# Altium PCB COMM_V3.PcbDoc (part 4 of 5)
Units mm, origin at the board's own origin, x right, y up, seen from the top; angles counter-clockwise.
Board outline 93 x 90 mm, 6 copper layers (Top Layer, L2_GND, L3_PWR, L4_SIG, L5_GND, Bottom Layer), stack 1.634 mm thick; 271 components, 237 nets, 1362 pads, 1090 vias.
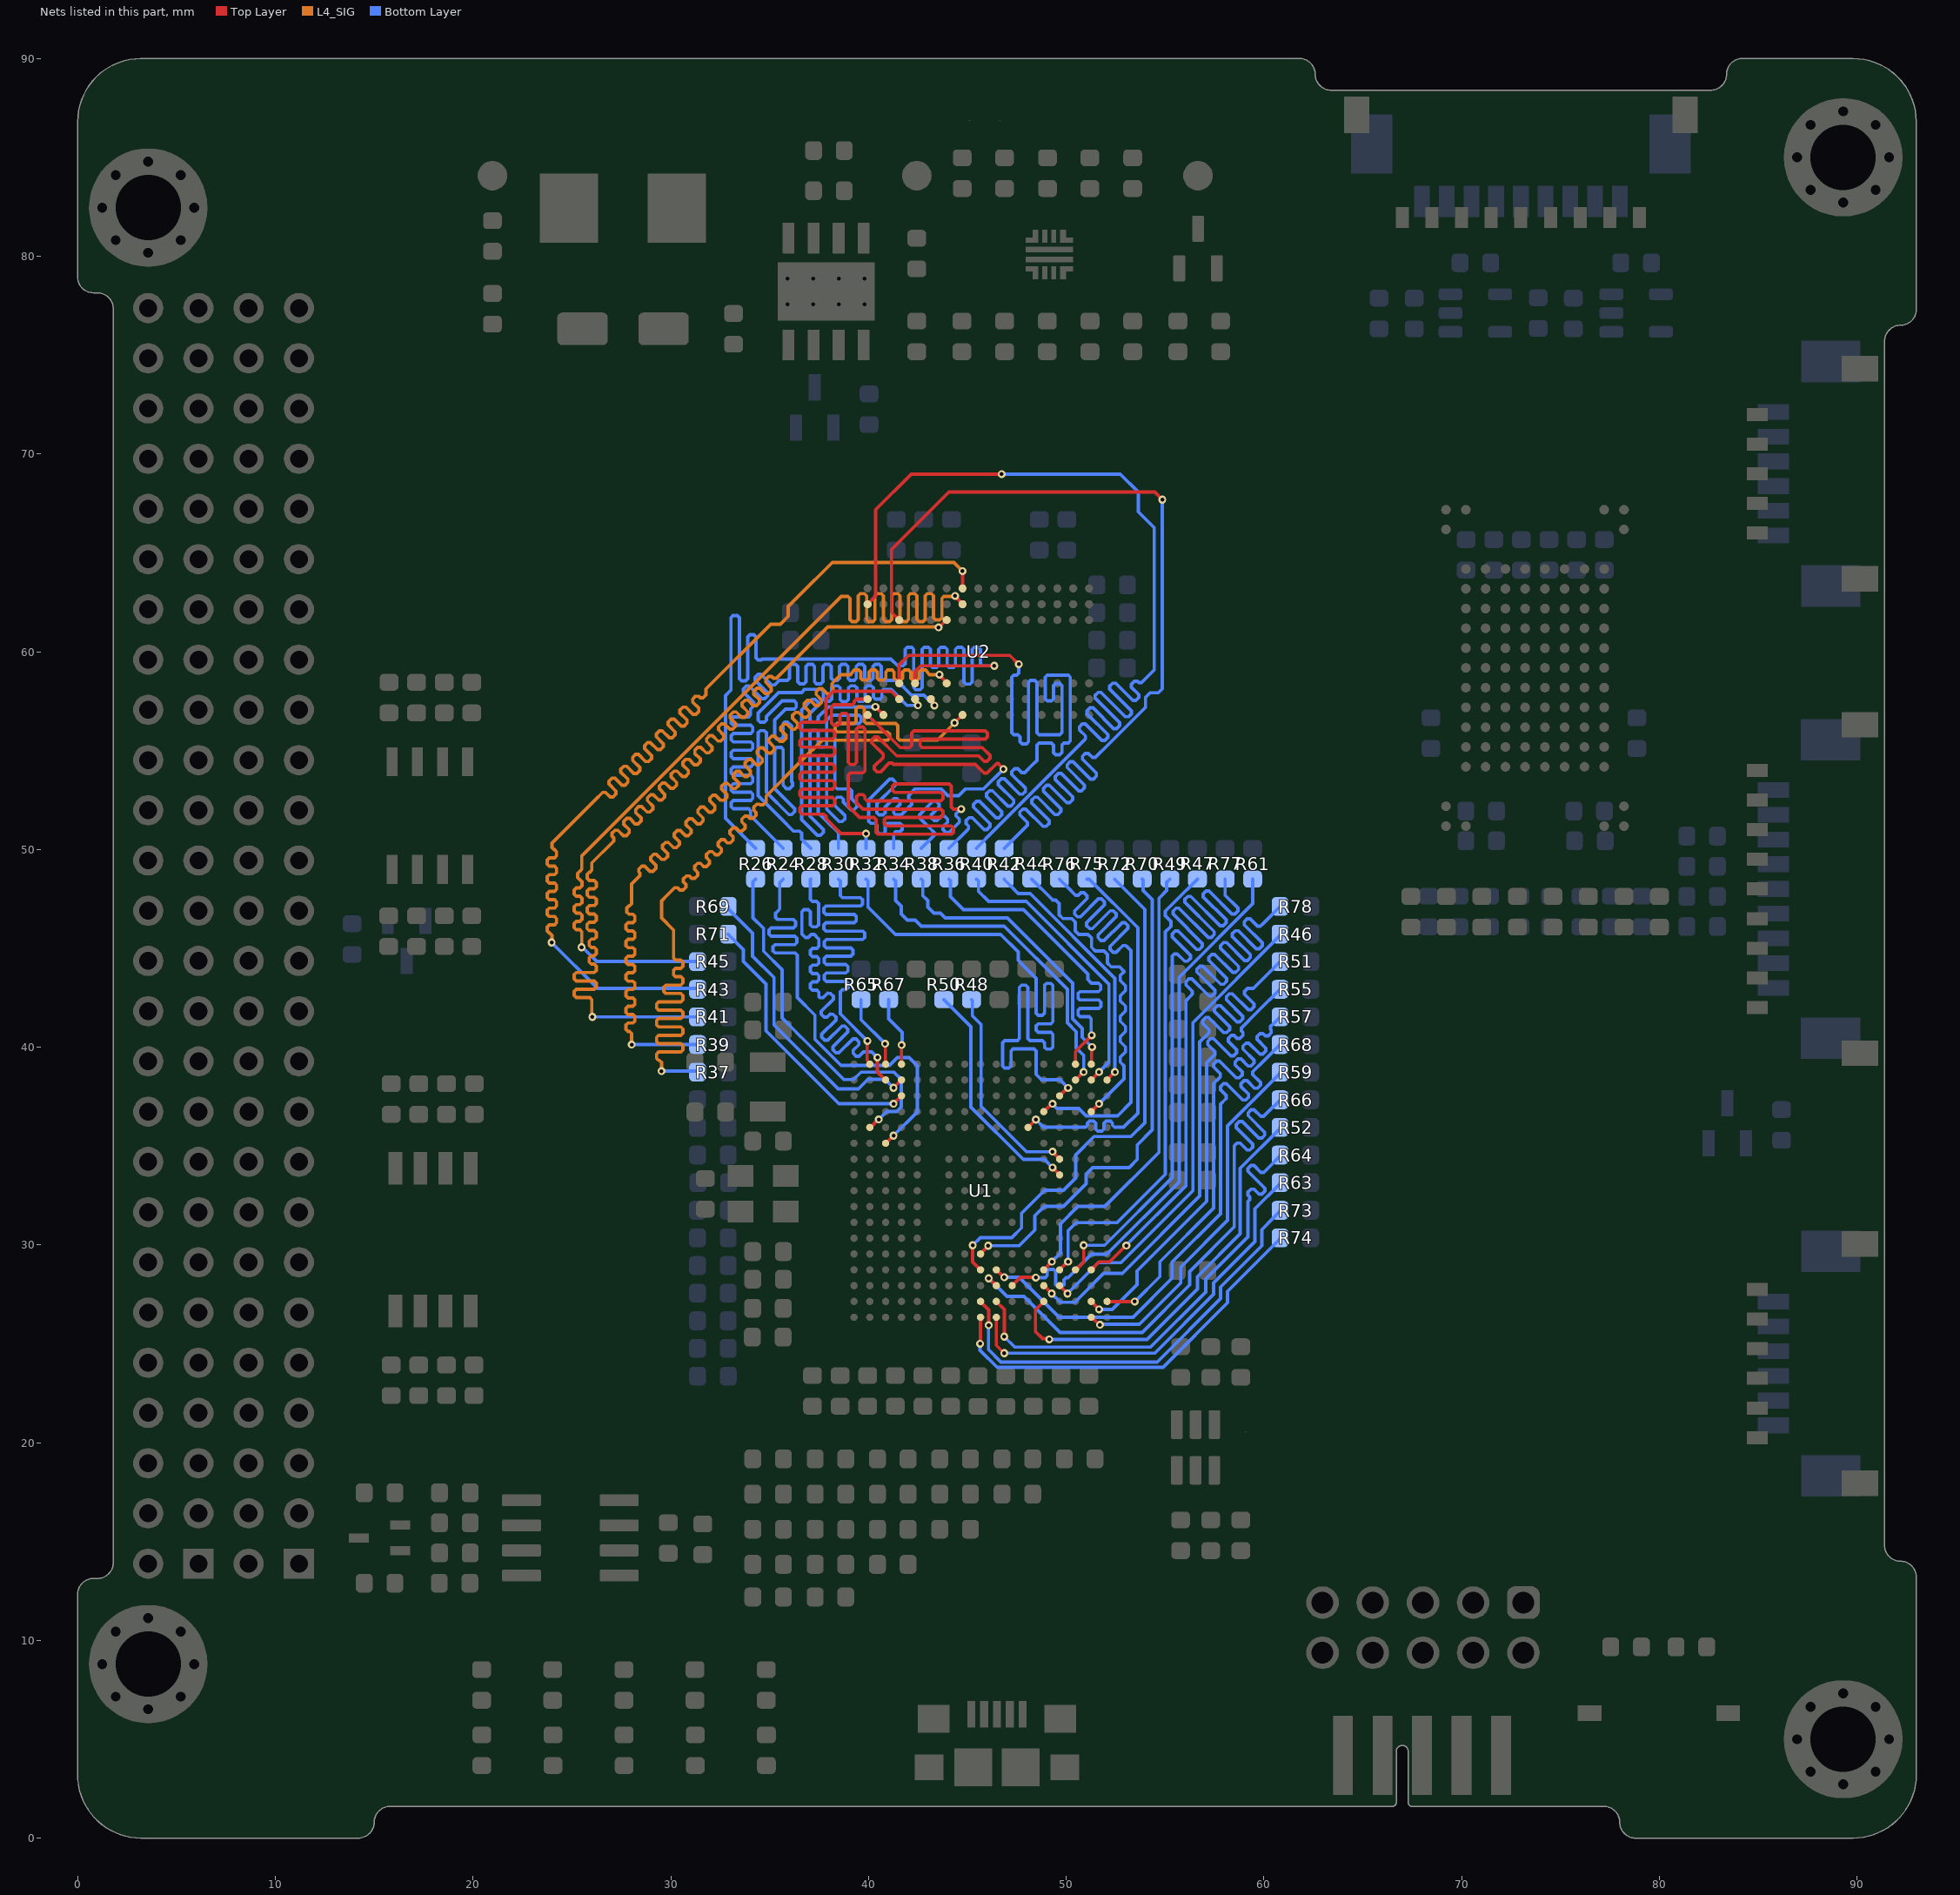
[diagram p8: the nets of this part, all layers, seen from the top]

## Via types
v1: diameter 0.4, hole 0.2, Top Layer to Bottom Layer, tented both sides, 1084 vias
v2: diameter 0.35, hole 0.2, Top Layer to Bottom Layer, tented both sides, 6 vias

## Nets (pads, with @x,y where several pads share a name; then routed paths per layer and width w, separated by ;. In a path a pad name is that pad's centre, name@x,y a point inside that pad or via, vN(x,y) a via of type N, cw(c..) or ccw(c..) an arc to the next point about the centre after c; other vN are vias at no path point) (continued)
SDRAM_B_D22: R42.1 U2.C7 | length 54
  Top Layer w0.169: U2.C7@41.557,61.601 41.166,61.993 41.166,65.169 44.069,68.072 54.483,68.072 v1(54.864,67.691)
  Bottom Layer w0.169: R42.1@46.863,50.051 46.876,50.051 47.979,51.154 48.038,51.213 48.038,51.363 47.658,51.744 47.658,51.893 47.807,52.043 47.957,52.043 48.834,51.165 48.984,51.165 49.133,51.315 49.133,51.464 48.256,52.342 48.256,52.491 48.405,52.641 48.555,52.641 49.432,51.763 49.582,51.763 49.732,51.913 49.732,52.063 48.854,52.94 48.854,53.09 49.004,53.239 49.153,53.239 50.031,52.362 50.18,52.362 50.33,52.511 50.33,52.661 49.452,53.538 49.452,53.688 49.602,53.837 49.751,53.837 50.629,52.96 50.778,52.96 50.928,53.109 50.928,53.259 50.051,54.136 50.051,54.286 50.2,54.436 50.35,54.436 51.227,53.558 51.377,53.558 51.526,53.708 51.526,53.857 50.823,54.56 50.823,54.71 50.973,54.859 51.122,54.859 51.329,54.653 51.478,54.653 52.13,55.305 54.011,57.186 54.011,57.696 54.238,57.923 54.666,57.923 54.864,58.121 54.864,62.918 v1(54.864,67.691)
SDRAM_B_D23: R40.1 U2.A8 | length 53.8
  Top Layer w0.169: U2.A8@39.957,62.401 40.366,62.81 40.366,67.186 42.162,68.982 v1(46.739,68.982)
  Bottom Layer w0.169: R40.1@45.466,50.051 45.466,50.07 45.946,50.551 45.946,50.564 50.916,55.534 50.976,55.594 50.976,55.743 50.671,56.048 50.671,56.198 50.82,56.348 50.97,56.348 51.805,55.512 51.955,55.512 52.104,55.662 52.104,55.811 51.058,56.858 51.058,57.007 51.207,57.157 51.357,57.157 52.403,56.11 52.553,56.11 52.702,56.26 52.702,56.41 51.464,57.647 51.464,57.797 51.614,57.947 51.764,57.947 53.001,56.709 53.151,56.709 53.301,56.858 53.301,57.008 52.202,58.106 52.202,58.256 52.351,58.406 52.501,58.406 53.374,57.533 53.523,57.533 53.673,57.683 53.673,57.832 53.305,58.2 53.305,58.349 53.455,58.499 53.604,58.499 53.668,58.435 53.817,58.435 54.412,59.03 54.455,59.073 54.455,66.268 53.648,67.075 53.648,68.074 52.74,68.982 v1(46.739,68.982)
SDRAM_B_D24: R38.1 U2.A2 | length 52.9
  Top Layer w0.169: U2.A2@39.957,57.601 39.386,57.601 39.287,57.502 39.287,57.418 39.182,57.312 38.872,57.312 38.238,57.312 38.132,57.206 38.132,56.392 38.238,56.286 38.449,56.286 38.555,56.392 38.555,56.783 38.661,56.889 38.872,56.889 38.978,56.783 38.978,54.401 39.084,54.295 39.295,54.295 39.401,54.401 39.401,56.086 39.507,56.192 39.718,56.192 39.824,56.086 39.824,53.978 39.718,53.872 39.084,53.872 38.978,53.766 38.978,52.191 39.555,51.614 40.276,51.614 40.382,51.508 40.382,50.874 40.488,50.768 44.189,50.768 44.295,50.874 44.295,51.085 44.189,51.191 40.911,51.191 40.805,51.297 40.805,51.508 40.911,51.614 43.66,51.614 43.766,51.72 43.766,51.931 43.66,52.037 39.73,52.037 39.401,52.366 39.401,52.669 39.507,52.774 39.718,52.774 39.824,52.669 39.824,52.566 39.93,52.46 43.66,52.46 43.766,52.566 43.766,52.777 43.66,52.883 41.327,52.883 41.221,52.989 41.221,53.2 41.327,53.306 44.083,53.306 44.189,53.2 44.189,52.566 44.189,52.143 44.295,52.037 44.379,52.037 v1(44.69,52.038) v1(44.69,52.038)
  Bottom Layer w0.169: R38.1@42.672,50.051 43.266,50.645 43.326,50.705 43.326,50.855 43.102,51.079 43.027,51.154 42.578,51.602 42.578,51.752 43.268,52.442 43.418,52.442 43.567,52.292 43.567,52.143 43.176,51.752 43.176,51.602 43.326,51.453 43.476,51.453 43.702,51.679 43.852,51.679 44.001,51.53 44.001,51.38 43.775,51.154 43.775,51.004 43.924,50.855 44.074,50.855 44.599,51.38 44.599,51.53 44.419,51.71 44.419,51.798 44.51,51.889 44.659,52.038 v1(44.69,52.038)
SDRAM_B_D25: R36.1 U2.C3 | length 49.2
  Top Layer w0.169: U2.C3@41.557,58.401 41.557,59.337 42.037,59.817 47.152,59.817 v1(47.604,59.365)
  Bottom Layer w0.169: R36.1@44.069,50.051 45.001,50.983 45.061,51.043 45.061,51.192 44.945,51.308 44.945,51.458 45.094,51.607 45.244,51.607 45.85,51.001 46,51.001 46.15,51.15 46.15,51.3 45.314,52.136 45.314,52.285 45.463,52.435 45.613,52.435 46.449,51.599 46.598,51.599 46.748,51.749 46.748,51.898 45.972,52.674 45.972,52.823 46.121,52.973 46.271,52.973 47.047,52.197 47.196,52.197 47.346,52.347 47.346,52.496 46.57,53.272 46.57,53.422 46.72,53.571 46.869,53.571 47.645,52.795 47.795,52.795 47.944,52.945 47.944,53.095 47.25,53.789 47.25,53.938 47.4,54.088 47.549,54.088 47.752,53.884 47.902,53.884 48.049,54.032 48.056,54.039 48.174,54.157 48.249,54.232 48.517,54.499 48.517,55.273 48.623,55.379 49.257,55.379 49.363,55.273 49.363,54.893 49.469,54.787 49.68,54.787 49.786,54.893 49.786,55.273 49.892,55.379 50.103,55.379 50.209,55.485 50.209,58.714 50.103,58.82 49.046,58.82 48.94,58.714 48.94,57.615 49.046,57.509 49.257,57.509 49.363,57.615 49.363,58.291 49.469,58.397 49.68,58.397 49.786,58.291 49.786,55.908 49.68,55.802 48.623,55.802 48.517,55.908 48.517,58.445 48.411,58.551 48.2,58.551 48.094,58.445 48.094,55.449 47.988,55.343 47.777,55.343 47.671,55.449 47.671,55.696 47.565,55.802 47.354,55.802 47.248,55.908 47.248,58.714 47.354,58.82 47.499,58.82 47.604,58.926 47.604,59.01 v1(47.604,59.365)
SDRAM_B_D26: R34.1 U2.A1 | length 49.9
  Top Layer w0.169: U2.A1@39.957,56.801 40.391,56.367 40.526,56.233 40.6,56.158 41.606,55.153 42.088,55.153 42.194,55.258 42.194,55.893 42.3,55.999 45.909,55.999 46.015,55.893 46.015,55.681 45.909,55.576 42.723,55.576 42.617,55.47 42.617,55.258 42.723,55.153 45.756,55.153 46.151,54.757 46.151,54.608 46.002,54.458 45.852,54.458 45.581,54.73 41.43,54.73 40.468,55.692 40.319,55.692 40.169,55.542 40.169,55.393 40.75,54.812 40.75,54.662 40.301,54.214 40.301,54.064 40.451,53.915 40.6,53.915 41.049,54.363 41.199,54.363 41.255,54.307 45.406,54.307 45.852,53.86 46.002,53.86 46.486,54.344 46.564,54.344 46.66,54.249 46.826,54.083 v1(46.826,54.06)
  Bottom Layer w0.169: R34.1@41.275,50.051 41.275,50.709 41.275,50.794 41.381,50.899 41.592,50.899 41.698,51.005 41.698,51.217 41.592,51.322 40.958,51.322 40.852,51.217 40.852,50.899 40.746,50.794 40.535,50.794 40.429,50.899 40.429,51.217 40.323,51.322 40.112,51.322 40.006,51.428 40.006,52.493 41.063,53.55 41.213,53.55 41.362,53.4 41.362,53.251 40.429,52.317 40.429,51.851 40.535,51.745 40.746,51.745 40.852,51.851 40.852,52.142 41.288,52.578 41.437,52.578 41.587,52.428 41.587,52.279 41.275,51.967 41.275,51.851 41.381,51.745 41.652,51.745 41.698,51.792 42.185,52.279 42.185,52.428 42.035,52.578 42.035,52.727 42.095,52.787 42.371,53.063 43.675,53.063 44.02,52.718 44.567,52.718 44.913,53.063 45.829,53.063 v1(46.826,54.06)
SDRAM_B_D27: R32.1 U2.C2 | length 31.9
  Top Layer w0.169: v1(39.878,50.8) 38.608,50.8 37.846,51.562 37.846,51.595 37.846,51.68 37.74,51.785 36.636,51.785 36.53,51.891 36.53,52.103 36.636,52.208 38.179,52.208 38.284,52.314 38.284,52.526 38.179,52.631 36.636,52.631 36.53,52.737 36.53,52.949 36.636,53.054 38.179,53.054 38.284,53.16 38.284,53.372 38.179,53.477 36.636,53.477 36.53,53.583 36.53,53.795 36.636,53.9 38.179,53.9 38.284,54.006 38.284,54.218 38.179,54.323 36.636,54.323 36.53,54.429 36.53,54.641 36.636,54.746 38.179,54.746 38.284,54.852 38.284,55.064 38.179,55.169 36.636,55.169 36.53,55.275 36.53,55.487 36.636,55.592 38.179,55.592 38.284,55.698 38.284,55.91 38.179,56.015 36.636,56.015 36.53,56.121 36.53,56.333 36.636,56.438 37.74,56.438 37.846,56.544 37.846,57.598 37.846,57.601 38.237,57.993 41.166,57.993 U2.C2@41.557,57.601
  Bottom Layer w0.169: R32.1@39.878,50.051 v1(39.878,50.8)
SDRAM_B_D28: R30.1 U2.B1 | length 42.4
  Top Layer w0.169: v1(40.351,57.21) 40.351,57.209 40.748,56.812 U2.B1@40.748,56.793
  Bottom Layer w0.169: R30.1@38.481,50.051 38.481,50.842 38.35,50.973 38.215,51.108 38.141,51.183 37.461,51.863 37.461,54.649 37.566,54.755 37.778,54.755 37.884,54.649 37.884,52.038 38.515,51.407 38.664,51.407 38.814,51.556 38.814,51.706 38.307,52.213 38.307,52.534 38.412,52.64 38.624,52.64 38.73,52.534 38.73,52.388 39.113,52.005 39.262,52.005 39.412,52.155 39.412,52.304 39.153,52.563 39.153,52.957 39.047,53.063 38.412,53.063 38.307,53.169 38.307,56.258 38.412,56.364 39.522,56.364 39.628,56.47 39.628,56.681 39.522,56.787 38.147,56.787 37.884,56.524 37.884,55.284 37.778,55.178 37.566,55.178 37.461,55.284 37.461,55.918 37.355,56.024 37.143,56.024 37.038,55.918 37.038,51.687 37.717,51.008 37.717,50.859 37.567,50.709 37.418,50.709 36.615,51.512 36.615,57.049 37.156,57.591 37.306,57.591 37.455,57.441 37.455,57.292 37.038,56.874 37.038,56.553 37.143,56.447 37.355,56.447 37.461,56.553 37.461,56.699 37.972,57.21 39.522,57.21 39.712,57.21 v1(40.351,57.21)
SDRAM_B_D29: R28.1 U2.D2 | length 43.3
  Top Layer w0.169: U2.D2@42.357,57.601 42.357,57.536 42.459,57.434 42.459,57.331 v1(42.504,57.286)
  Bottom Layer w0.169: R28.1@37.084,50.051 36.615,50.52 36.615,50.828 36.516,50.927 36.208,50.927 36.063,51.072 35.929,51.206 35.854,51.281 34.417,52.718 34.417,55.903 34.523,56.009 34.734,56.009 34.84,55.903 34.84,52.893 35.97,51.763 36.12,51.763 36.269,51.913 36.269,52.062 35.263,53.068 35.263,55.057 35.369,55.163 35.58,55.163 35.686,55.057 35.686,53.244 35.854,53.076 36.004,53.076 36.153,53.225 36.153,53.375 36.109,53.419 36.109,56.196 36.109,56.243 35.908,56.444 35.759,56.444 35.686,56.371 35.686,55.692 35.58,55.586 35.369,55.586 35.263,55.692 35.263,56.546 35.807,57.09 36.241,57.09 36.347,57.196 36.347,57.408 36.241,57.513 35.632,57.513 34.84,56.722 34.84,56.538 34.734,56.432 34.523,56.432 34.417,56.538 34.417,56.897 35.457,57.936 36.424,57.936 36.615,57.936 36.78,58.101 37.107,58.101 37.614,58.101 37.72,57.996 37.72,57.605 37.826,57.499 38.037,57.499 38.143,57.605 38.143,58.171 38.249,58.276 38.46,58.276 38.566,58.171 38.566,57.587 38.672,57.481 38.883,57.481 38.989,57.587 38.989,58.171 39.095,58.276 39.306,58.276 39.412,58.171 39.412,57.587 39.518,57.481 39.729,57.481 39.835,57.587 39.835,58.171 39.941,58.276 40.152,58.276 40.258,58.171 40.258,57.702 40.364,57.596 40.575,57.596 40.681,57.702 40.681,57.996 40.787,58.101 41.126,58.101 41.499,57.727 41.941,57.286 v1(42.504,57.286)
SDRAM_B_D30: R26.1 U2.D3 | length 50
  Top Layer w0.169: U2.D3@42.357,58.401 42.357,59.005 42.637,59.285 v1(46.36,59.285)
  Bottom Layer w0.169: R26.1@34.29,50.051 32.766,51.575 32.766,57.785 32.96,57.979 33.045,58.064 33.045,61.724 33.151,61.83 33.362,61.83 33.468,61.724 33.468,58.633 33.574,58.527 33.785,58.527 33.891,58.633 33.891,60.75 33.997,60.856 34.208,60.856 34.314,60.75 34.314,59.694 34.42,59.588 34.569,59.588 34.611,59.63 35.169,59.63 41.135,59.63 41.48,59.285 41.673,59.285 41.758,59.285 41.863,59.391 41.863,60.122 41.969,60.228 42.181,60.228 42.286,60.122 42.286,58.183 42.392,58.078 42.604,58.078 42.709,58.183 42.709,60.122 42.815,60.228 43.027,60.228 43.132,60.122 43.132,59.308 43.238,59.203 43.45,59.203 43.555,59.308 43.555,60.122 43.661,60.228 43.873,60.228 43.978,60.122 43.978,59.308 44.084,59.203 44.296,59.203 44.401,59.308 44.401,60.122 44.507,60.228 44.719,60.228 44.824,60.122 44.824,58.469 44.93,58.363 45.142,58.363 45.247,58.469 45.247,60.122 45.353,60.228 45.565,60.228 45.67,60.122 45.67,59.391 45.776,59.285 45.967,59.285 v1(46.36,59.285)
SDRAM_B_D31: R24.1 U2.E2 | length 42.6
  Top Layer w0.169: U2.E2@43.157,57.601 43.157,57.536 43.289,57.404 43.289,57.321 v1(43.333,57.276)
  Bottom Layer w0.169: R24.1@35.687,50.051 34.036,51.702 34.036,51.864 34.036,51.949 33.93,52.055 33.159,52.055 33.054,52.16 33.054,52.372 33.159,52.478 34.041,52.478 34.146,52.583 34.146,52.795 34.041,52.901 33.159,52.901 33.054,53.006 33.054,53.218 33.159,53.324 34.041,53.324 34.146,53.429 34.146,53.641 34.041,53.747 33.159,53.747 33.054,53.852 33.054,54.064 33.159,54.17 34.041,54.17 34.146,54.275 34.146,54.487 34.041,54.593 33.159,54.593 33.054,54.698 33.054,54.91 33.159,55.016 34.041,55.016 34.146,55.121 34.146,55.333 34.041,55.439 33.159,55.439 33.054,55.544 33.054,55.756 33.159,55.862 34.041,55.862 34.146,55.967 34.146,56.179 34.041,56.285 33.159,56.285 33.054,56.39 33.054,56.602 33.159,56.708 33.93,56.708 34.036,56.813 34.036,57.1 34.061,57.125 34.146,57.21 34.206,57.27 34.206,57.42 33.668,57.957 33.668,58.107 33.818,58.256 33.967,58.256 34.606,57.618 34.756,57.618 34.905,57.768 34.905,57.917 34.267,58.556 34.267,58.705 34.416,58.855 34.566,58.855 35.103,58.317 35.253,58.317 35.49,58.553 35.57,58.553 35.81,58.553 35.895,58.553 36.001,58.659 36.001,59.254 36.106,59.359 36.318,59.359 36.424,59.254 36.424,58.478 36.529,58.372 36.741,58.372 36.847,58.478 36.847,59.254 36.952,59.359 37.164,59.359 37.27,59.254 37.27,58.478 37.375,58.372 37.587,58.372 37.693,58.478 37.693,59.254 37.798,59.359 38.01,59.359 38.116,59.254 38.116,58.653 38.221,58.547 38.433,58.547 38.539,58.653 38.539,59.254 38.644,59.359 38.856,59.359 38.962,59.254 38.962,58.653 39.067,58.547 39.279,58.547 39.385,58.653 39.385,59.254 39.49,59.359 39.702,59.359 39.808,59.254 39.808,58.653 39.913,58.547 40.125,58.547 40.231,58.653 40.231,59.254 40.336,59.359 40.548,59.359 40.654,59.254 40.654,58.653 40.759,58.547 40.837,58.547 40.922,58.547 41.434,58.547 42.174,57.807 42.802,57.807 v1(43.333,57.276)
SDRAM_BA0: R50.1 U1.H14 | length 11.9
  Top Layer w0.169: v1(49.308,33.914) 49.308,33.907 49.669,33.546 U1.H14@49.669,33.539
  Bottom Layer w0.169: R50.1@43.815,42.405 45.186,41.034 45.186,36.971 47.831,34.326 48.895,34.326 v1@49.307,33.914
SDRAM_BA1: R48.1 U1.G14 | length 10.7
  Top Layer w0.169: v1(49.308,34.713) 49.308,34.706 49.669,34.345 U1.G14@49.669,34.339
  Bottom Layer w0.169: R48.1@45.212,42.405 45.258,42.359 45.258,41.588 45.698,41.148 45.698,37.004 47.989,34.713 v1(49.308,34.713)
SDRAM_D0: R78.2 U1.P16 | length 37.5
  Top Layer w0.169: U1.P16@51.269,28.739 51.673,29.143 52.201,29.143 53.025,29.967 v1(53.044,29.967)
  Bottom Layer w0.169: v1(53.044,29.967) 53.044,29.986 56.063,33.005 56.063,42.36 56.321,42.618 56.381,42.678 56.381,42.828 56.06,43.149 56.06,43.299 56.21,43.448 56.359,43.448 57.223,42.585 57.373,42.585 57.522,42.734 57.522,42.884 56.612,43.794 56.612,43.944 56.762,44.093 56.912,44.093 57.822,43.183 57.971,43.183 58.121,43.333 58.121,43.483 57.211,44.393 57.211,44.542 57.361,44.692 57.51,44.692 58.42,43.782 58.57,43.782 58.72,43.932 58.72,44.081 57.81,44.992 57.81,45.141 57.959,45.291 58.109,45.291 59.019,44.381 59.169,44.381 59.318,44.53 59.318,44.68 58.408,45.59 58.408,45.74 58.558,45.89 58.708,45.89 59.618,44.979 59.767,44.979 59.917,45.129 59.917,45.279 59.007,46.189 59.007,46.339 59.157,46.488 59.306,46.488 59.674,46.121 59.824,46.121 59.979,46.276 R78.2@60.82,47.117
SDRAM_D1: R77.2 U1.P15 | length 40
  Top Layer w0.169: U1.P15@50.486,28.739 50.887,29.14 v1(50.887,29.979)
  Bottom Layer w0.169: v1(50.887,29.979) 51.944,29.979 55.365,33.4 55.365,44.253 55.365,44.611 55.471,44.716 55.621,44.716 55.992,44.345 56.142,44.345 56.292,44.495 56.292,44.644 55.362,45.573 55.362,45.723 55.512,45.873 55.662,45.873 56.591,44.944 56.741,44.944 56.89,45.093 56.89,45.243 55.404,46.73 55.404,46.879 55.553,47.029 55.703,47.029 57.19,45.542 57.339,45.542 57.489,45.692 57.489,45.842 56.002,47.328 56.002,47.478 56.152,47.628 56.302,47.628 57.788,46.141 57.938,46.141 58.088,46.291 58.088,46.44 56.929,47.599 56.929,47.749 57.079,47.899 57.228,47.899 58.387,46.74 58.537,46.74 58.686,46.89 58.686,47.039 58.039,47.686 58.039,48.446 R77.2@58.039,48.501
SDRAM_D2: R76.2 U1.D13 | length 27.9
  Top Layer w0.169: U1.D13@48.869,36.739 v1@49.269,37.139
  Bottom Layer w0.169: v1(49.308,37.139) 49.544,36.903 50.637,36.903 51.007,36.533 52.604,36.533 53.273,37.202 53.273,44.885 53.077,45.081 53.017,45.141 52.867,45.141 52.522,44.796 52.372,44.796 52.223,44.946 52.223,45.095 53.129,46.001 53.129,46.151 52.979,46.301 52.83,46.301 51.914,45.386 51.765,45.386 51.615,45.535 51.615,45.685 52.53,46.6 52.53,46.75 52.38,46.899 52.231,46.899 51.329,45.998 51.18,45.998 51.03,46.148 51.03,46.297 51.931,47.199 51.931,47.349 51.782,47.498 51.632,47.498 50.726,46.592 50.576,46.592 50.427,46.742 50.427,46.891 51.051,47.516 51.051,47.665 50.901,47.815 50.751,47.815 50.622,47.686 50.472,47.686 50.129,48.029 R76.2@49.657,48.501
SDRAM_D3: R75.2 U1.E12 | length 20.3
  Top Layer w0.169: U1.E12@48.069,35.939 v1(48.469,36.339)
  Bottom Layer w0.169: v1(48.469,36.339) 48.861,35.947 50.882,35.947 50.967,35.947 51.073,36.053 51.073,36.156 51.179,36.262 51.39,36.262 51.496,36.156 51.496,35.857 51.602,35.751 51.814,35.751 51.92,35.857 51.92,36.156 52.025,36.262 52.237,36.262 52.343,36.156 52.343,36.053 52.449,35.947 52.733,35.947 52.904,35.947 53.622,36.665 53.622,46.041 51.162,48.501 R75.2@51.054,48.501
SDRAM_D4: R74.2 U1.U9 | length 20.3
  Top Layer w0.169: v1(45.648,25.002) 45.659,25.012 45.659,26.324 U1.U9@45.669,26.334
  Bottom Layer w0.169: v1(45.648,25.002) 45.648,24.674 46.513,23.809 54.897,23.809 58.166,27.078 58.166,27.649 60.81,30.293 60.82,30.293 R74.2@60.82,30.353
SDRAM_D5: R73.2 U1.T9 | length 21.6
  Top Layer w0.169: U1.T9@45.669,27.139 45.669,27.123 46.081,26.711 v1(46.081,25.935)
  Bottom Layer w0.169: v1(46.081,25.935) 46.069,25.923 46.069,24.717 46.705,24.08 54.608,24.08 57.806,27.279 57.806,27.868 59.894,29.955 59.894,30.774 60.473,31.353 60.82,31.7 R73.2@60.82,31.75
SDRAM_D6: R72.2 U1.P9 | length 26.8
  Top Layer w0.169: v1(45.269,29.979) 45.269,29.139 U1.P9@45.669,28.739
  Bottom Layer w0.169: v1(45.269,29.979) 45.662,30.373 47.254,30.373 47.742,30.861 47.742,31.595 48.912,32.764 49.868,32.764 50.478,33.374 50.478,34.544 51.414,35.48 53.279,35.48 53.979,36.18 53.979,46.965 52.451,48.493 R72.2@52.451,48.501
SDRAM_D7: R70.2 U1.N9 | length 25.3
  Top Layer w0.169: U1.N9@45.669,29.539 45.669,29.556 46.055,29.942 v1(46.055,29.959)
  Bottom Layer w0.169: v1(46.055,29.959) 47.625,29.959 48.417,30.751 48.417,31.475 48.891,31.949 49.868,31.949 51.007,33.088 51.007,33.582 51.338,33.913 53.181,33.913 53.594,34.326 53.594,35.052 54.356,35.814 54.356,47.461 53.896,47.921 53.896,48.453 R70.2@53.848,48.501
SDRAM_D8: R68.2 U1.P10 | length 28.4
  Top Layer w0.169: U1.P10@46.469,28.739 46.479,28.739 46.855,28.363 v1(46.865,28.363)
  Bottom Layer w0.169: v1(46.865,28.363) 47.62,28.363 49.64,26.343 53.383,26.343 55.358,28.318 55.358,29.132 57.806,31.58 57.806,37.118 58.037,37.349 58.097,37.409 58.097,37.559 57.803,37.852 57.803,38.002 57.953,38.151 58.103,38.151 58.928,37.326 59.078,37.326 59.228,37.476 59.228,37.625 58.845,38.008 58.845,38.157 58.995,38.307 59.145,38.307 59.527,37.925 59.677,37.925 59.826,38.074 59.826,38.224 59.444,38.606 59.444,38.756 59.979,39.291 R68.2@60.82,40.132
SDRAM_D9: R66.2 U1.R10 | length 29.1
  Top Layer w0.169: v1(46.081,28.307) 46.091,28.307 46.459,27.939 U1.R10@46.469,27.939 U1.R10@46.469,27.933
  Bottom Layer w0.169: v1(46.081,28.307) 47,27.389 47.867,27.389 49.685,25.57 53.842,25.57 56.248,27.976 56.248,28.655 58.504,30.911 58.504,34.721 58.504,35.009 58.539,35.044 58.644,35.149 58.794,35.149 59.145,34.799 59.295,34.799 59.444,34.948 59.444,35.098 58.605,35.937 58.605,36.087 58.755,36.237 58.904,36.237 59.744,35.397 59.893,35.397 60.043,35.547 60.043,35.697 59.204,36.536 59.204,36.686 59.353,36.835 59.503,36.835 59.842,36.497 59.992,36.497 60.237,36.742 60.82,37.325 R66.2@60.82,37.338
SDRAM_D10: R64.2 U1.T10 | length 24.3
  Top Layer w0.169: U1.T10@46.469,27.139 46.88,26.728 46.88,25.375 v1(46.865,25.36)
  Bottom Layer w0.169: v1(46.865,25.36) 47.394,24.831 54.268,24.831 57.059,27.622 57.059,28.268 59.201,30.41 59.201,32.204 59.224,32.226 59.284,32.286 59.284,32.436 59.198,32.521 59.198,32.671 59.348,32.82 59.498,32.82 59.754,32.564 59.904,32.564 60.053,32.714 60.053,32.863 59.198,33.718 59.198,33.868 59.348,34.018 59.498,34.018 59.846,33.669 59.995,33.669 60.266,33.94 60.82,34.494 R64.2@60.82,34.544
SDRAM_D11: R63.2 U1.U10 | length 20.8
  Top Layer w0.169: U1.U10@46.469,26.339 46.469,24.922 46.865,24.526 v1(46.865,24.522)
  Bottom Layer w0.169: v1@46.869,24.522 54.483,24.522 57.458,27.497 57.458,28.072 59.55,30.164 59.55,31.827 60.82,33.097 R63.2@60.82,33.147
SDRAM_D12: R61.2 U1.R11 | length 28.9
  Top Layer w0.169: U1.R11@47.269,27.939 47.693,28.363 48.441,28.363 v1(48.46,28.344)
  Bottom Layer w0.169: v1(48.46,28.344) 48.852,28.344 48.936,28.344 49.042,28.45 49.042,28.658 49.148,28.764 49.36,28.764 49.465,28.658 49.465,27.975 49.571,27.87 49.783,27.87 49.889,27.975 49.889,28.238 49.995,28.344 50.096,28.344 50.907,29.155 51.276,29.524 52.055,29.524 55.714,33.183 55.714,43.534 59.436,47.256 R61.2@59.436,48.501
SDRAM_D13: R59.2 U1.U16 | length 18.3
  Top Layer w0.169: U1.U16@51.269,26.339 51.299,26.339 51.682,25.957 v1(51.712,25.957)
  Bottom Layer w0.169: v1(51.712,25.957) 51.737,25.982 53.703,25.982 55.794,28.072 55.794,28.87 58.166,31.242 58.156,35.814 58.156,36.021 60.82,38.685 R59.2@60.82,38.735
SDRAM_D14: R57.2 U1.T17 | length 24.7
  Top Layer w0.169: U1.T17@52.069,27.139 52.071,27.137 53.465,27.137 v1(53.467,27.136)
  Bottom Layer w0.169: v1(53.467,27.136) 53.476,27.136 54.737,28.396 54.737,29.147 57.458,31.868 57.458,38.167 57.738,38.447 57.798,38.507 57.798,38.656 57.455,38.999 57.455,39.149 57.604,39.298 57.754,39.298 58.604,38.449 58.753,38.449 58.903,38.598 58.903,38.748 58.546,39.105 58.546,39.255 58.696,39.405 58.845,39.405 59.203,39.047 59.352,39.047 59.502,39.197 59.502,39.347 58.943,39.905 58.943,40.055 59.093,40.205 59.243,40.205 59.801,39.646 59.951,39.646 60.101,39.796 60.101,39.945 59.656,40.39 59.656,40.54 59.805,40.69 59.955,40.69 60.072,40.573 60.222,40.573 60.371,40.722 60.371,40.872 60.342,40.901 60.342,41.051 60.486,41.195 R57.2@60.82,41.529
SDRAM_D15: R55.2 U1.T16 | length 24
  Top Layer w0.169: U1.T16@51.269,27.139 v1(51.669,26.739)
  Bottom Layer w0.169: v1(51.669,26.739) 52.331,26.739 53.587,27.996 53.587,28.682 57.109,32.204 57.109,39.215 57.458,39.564 57.518,39.624 57.518,39.773 57.16,40.13 57.16,40.28 57.31,40.43 57.46,40.43 58.324,39.566 58.473,39.566 58.623,39.715 58.623,39.865 58.199,40.289 58.199,40.439 58.349,40.589 58.498,40.589 58.64,40.447 58.79,40.447 58.94,40.596 58.94,40.746 58.865,40.821 58.865,40.971 59.687,41.793 R55.2@60.82,42.926
SDRAM_D16: R52.2 U1.T13 | length 21
  Top Layer w0.169: U1.T13@48.869,27.139 48.869,27.099 48.829,27.099 48.449,26.719 48.449,25.611 48.803,25.258 49.109,25.258 v1(49.144,25.223)
  Bottom Layer w0.169: v1(49.144,25.223) 54.091,25.223 56.642,27.774 56.642,28.396 58.803,30.557 58.803,33.875 60.82,35.892 R52.2@60.82,35.941
SDRAM_D17: R51.2 U1.R13 | length 31.5
  Top Layer w0.169: U1.R13@48.869,27.939 v1(49.269,27.539)
  Bottom Layer w0.169: v1@49.269,27.53 49.278,27.53 49.708,27.1 50.456,27.1 ; 50.437,27.1 51.892,28.555 52.846,28.555 56.76,32.47 56.76,40.263 57.167,40.67 57.227,40.73 57.227,40.88 56.906,41.202 56.906,41.351 57.055,41.501 57.205,41.501 57.967,40.739 58.116,40.739 58.266,40.889 58.266,41.039 57.504,41.8 57.504,41.95 57.654,42.1 57.804,42.1 58.632,41.271 58.782,41.271 58.932,41.421 58.932,41.571 58.103,42.399 58.103,42.549 58.253,42.698 58.402,42.698 59.21,41.891 59.36,41.891 59.509,42.041 59.509,42.19 59.023,42.676 59.023,42.826 59.173,42.975 59.323,42.975 59.472,42.975 60.005,43.508 R51.2@60.82,44.323
SDRAM_D18: R49.2 U1.P13 | length 23.2
  Top Layer w0.169: U1.P13@48.869,28.739 v1(49.278,29.15)
  Bottom Layer w0.169: v1(49.278,29.15) 49.71,29.582 49.71,31.06 50.6,31.949 51.961,31.949 54.698,34.685 54.698,47.532 55.087,47.921 55.087,48.343 R49.2@55.245,48.501
SDRAM_D19: R47.2 U1.P14 | length 24.1
  Top Layer w0.169: U1.P14@49.669,28.739 49.669,28.746 50.063,29.14 v1@50.063,29.147
  Bottom Layer w0.169: v1(50.096,29.147) 50.096,30.72 50.499,31.123 52.574,31.123 55.017,33.566 55.017,45.532 55.017,45.74 55.017,45.825 55.3,46.108 55.3,46.362 55.017,46.645 55.017,46.73 55.017,46.876 55.548,47.407 R47.2@56.642,48.501
SDRAM_D20: R46.2 U1.R14 | length 23.9
  Top Layer w0.169: U1.R14@49.669,27.939 v1(50.069,27.539)
  Bottom Layer w0.169: v1(50.069,27.539) 51.631,29.101 52.772,29.101 56.412,32.741 56.412,41.24 60.82,45.649 R46.2@60.82,45.72
SDRAM_D21: R44.2 U1.D16 | length 16.5
  Top Layer w0.169: U1.D16@51.269,36.739 v1(51.669,37.139)
  Bottom Layer w0.169: R44.2@48.26,48.501 49.263,47.498 49.323,47.438 49.473,47.438 49.652,47.258 49.652,46.684 49.832,46.504 50.281,46.504 50.46,46.325 50.46,45.876 50.64,45.697 51.106,45.697 51.286,45.517 51.286,45.051 51.465,44.871 51.914,44.871 52.094,44.691 52.094,44.243 52.273,44.063 52.698,44.063 52.924,43.837 52.924,43.811 52.74,43.627 52.74,43.373 53.002,43.111 53.002,42.857 52.74,42.594 52.74,42.34 53.002,42.078 53.002,41.824 52.74,41.562 52.74,41.308 53.002,41.046 53.002,40.792 52.74,40.53 52.74,40.276 53.002,40.014 53.002,39.76 52.74,39.497 52.74,39.243 52.924,39.059 52.924,38.394 v1(51.669,37.139)
SDRAM_D22: R42.2 U1.B17 | length 13
  Top Layer w0.169: U1.B17@52.069,38.339 v1(52.469,38.741)
  Bottom Layer w0.169: R42.2@46.863,48.501 46.863,48.482 47.406,47.939 47.406,47.935 47.572,47.769 48.184,47.769 52.469,43.484 v1(52.469,38.741)
SDRAM_D23: R40.2 U1.B16 | length 14.4
  Top Layer w0.169: U1.B16@51.269,38.339 v1(51.669,38.741)
  Bottom Layer w0.169: R40.2@45.466,48.501 45.564,48.403 45.564,47.885 46.075,47.374 47.987,47.374 52.162,43.199 52.162,39.232 51.671,38.741 v1(51.669,38.741)
SDRAM_D24: R38.2 U1.A16 | length 15
  Top Layer w0.169: U1.A16@51.269,39.139 51.289,39.158 51.289,39.986 v1(51.308,40.005)
  Bottom Layer w0.169: R38.2@42.672,48.501 42.75,48.423 42.75,47.661 42.994,47.417 42.994,47.082 43.303,46.773 43.638,46.773 43.874,46.537 47.034,46.537 50.329,43.242 50.329,41.437 50.817,40.95 50.817,40.496 v1(51.308,40.005)
SDRAM_D25: R36.2 U1.A15 | length 18.5
  Top Layer w0.169: U1.A15@50.469,39.139 50.469,39.774 v1(51.295,40.599)
  Bottom Layer w0.169: R36.2@44.069,48.501 44.147,48.423 44.147,47.607 44.798,46.956 47.838,46.956 51.092,43.702 51.092,43.423 51.282,43.232 51.639,43.232 51.745,43.127 51.745,42.915 51.639,42.809 50.706,42.809 50.6,42.703 50.6,42.492 50.706,42.386 51.658,42.386 51.764,42.28 51.764,42.068 51.658,41.962 50.706,41.962 50.6,41.857 50.6,41.645 50.706,41.539 51.16,41.539 51.266,41.433 51.266,41.226 51.266,40.628 v1(51.295,40.599)
SDRAM_D26: R34.2 U1.B15 | length 17
  Top Layer w0.169: U1.B15@50.469,38.339 50.477,38.339 50.879,38.741 v1(50.887,38.741)
  Bottom Layer w0.169: R34.2@41.275,48.501 41.373,48.403 41.373,47.417 41.653,47.137 41.653,46.737 41.961,46.429 42.36,46.429 42.671,46.118 46.861,46.118 50.058,42.921 50.058,41.234 50.511,40.782 50.511,39.965 50.887,39.589 v1(50.887,38.741)
SDRAM_D27: R32.2 U1.C14 | length 36.2
  Top Layer w0.169: U1.C14@49.669,37.539 v1@50.069,37.939
  Bottom Layer w0.169: R32.2@39.878,48.501 39.976,48.403 39.976,47.085 41.363,45.697 ; 41.363,45.7 46.688,45.7 47.572,44.815 47.572,44.396 47.781,44.187 48.482,43.486 48.482,41.71 48.588,41.604 48.8,41.604 48.906,41.71 48.906,43.122 49.012,43.227 49.223,43.227 49.329,43.122 49.329,41.286 49.223,41.181 48.588,41.181 48.482,41.075 48.482,40.863 48.588,40.757 49.223,40.757 49.329,40.651 49.329,40.006 49.223,39.9 49.012,39.9 48.906,40.006 48.906,40.228 48.8,40.334 48.165,40.334 48.059,40.44 48.059,43.029 47.953,43.135 47.742,43.135 47.636,43.029 47.636,40.44 47.53,40.334 46.895,40.334 46.789,40.228 46.789,39.045 46.895,38.939 47.107,38.939 47.212,39.045 47.212,39.805 47.318,39.911 48.377,39.911 48.482,39.805 48.482,38.625 48.757,38.35 49.301,38.35 49.452,38.35 49.684,38.35 v1(50.096,37.939)
SDRAM_D28: R30.2 U1.A2 | length 25.9
  Top Layer w0.169: v1(39.948,40.313) 39.93,40.296 39.93,39.332 40.069,39.193 U1.A2@40.069,39.139
  Bottom Layer w0.169: R30.2@38.481,48.501 38.575,48.407 38.575,47.752 38.575,47.667 38.681,47.561 39.599,47.561 39.705,47.456 39.705,47.244 39.599,47.138 37.855,47.138 37.749,47.032 37.749,46.821 37.855,46.715 39.28,46.715 39.386,46.609 39.386,46.397 39.28,46.291 37.855,46.291 37.749,46.186 37.749,45.974 37.855,45.868 39.71,45.868 39.816,45.762 39.816,45.551 39.71,45.445 37.867,45.445 37.761,45.339 37.761,45.127 37.867,45.021 39.112,45.021 39.218,44.916 39.218,44.704 39.112,44.598 37.867,44.598 37.761,44.492 37.761,44.281 37.867,44.175 38.857,44.175 38.963,44.069 38.963,43.857 38.857,43.751 37.867,43.751 37.761,43.646 37.761,43.434 37.867,43.328 38.865,43.328 38.971,43.222 38.971,43.011 38.865,42.905 38.681,42.905 38.575,42.799 38.575,41.687 38.746,41.515 v1(39.948,40.313)
SDRAM_D29: R28.2 U1.B3 | length 23.9
  Top Layer w0.169: v1(40.455,39.475) 40.455,38.753 U1.B3@40.869,38.339
  Bottom Layer w0.169: R28.2@37.084,48.501 37.055,48.472 37.055,47.561 37.055,47.477 37.16,47.371 37.372,47.371 37.478,47.265 37.478,46.191 37.372,46.085 37.16,46.085 37.055,46.191 37.055,46.842 36.949,46.948 36.737,46.948 36.631,46.842 36.631,45.721 36.808,45.544 36.957,45.544 37.107,45.694 37.257,45.694 37.49,45.46 37.49,45.101 37.385,44.995 37.173,44.995 37.067,44.889 37.067,44.678 37.173,44.572 37.385,44.572 37.49,44.466 37.49,44.254 37.385,44.149 37.173,44.149 37.067,44.043 37.067,43.831 37.173,43.725 37.385,43.725 37.49,43.619 37.49,43.408 37.385,43.302 37.173,43.302 37.067,43.196 37.067,42.984 37.173,42.879 37.385,42.879 37.49,42.773 37.49,42.688 37.49,42.615 37.49,42.561 37.523,42.528 37.553,42.499 37.702,42.498 37.932,42.723 38.081,42.722 38.23,42.571 38.228,42.421 37.612,41.815 37.611,41.666 37.76,41.515 37.909,41.513 38.066,41.667 38.215,41.666 38.364,41.515 38.362,41.365 37.641,40.656 37.639,40.506 37.788,40.355 37.938,40.354 38.662,41.067 38.812,41.065 38.96,40.914 38.959,40.765 38.203,40.021 38.202,39.872 38.35,39.721 38.5,39.719 39.215,40.422 39.364,40.421 39.513,40.27 39.511,40.12 39.232,39.845 39.23,39.696 39.379,39.545 39.529,39.543 39.743,39.755 39.864,39.755 40.17,39.755 40.45,39.475 v1(40.455,39.475)
SDRAM_D30: R26.2 U1.E2 | length 18.7
  Top Layer w0.169: U1.E2@40.069,35.939 40.091,35.939 40.497,36.345 v1(40.52,36.345)
  Bottom Layer w0.169: R26.2@34.29,48.501 34.163,48.374 34.163,46.536 34.695,46.005 34.695,44.854 35.636,43.913 35.636,41.473 36.368,40.741 36.368,40.73 36.579,40.518 36.591,40.518 38.749,38.36 39.245,38.36 39.624,38.739 41.294,38.739 41.664,38.369 41.664,36.976 41.428,36.74 40.921,36.74 40.525,36.345 v1(40.52,36.345)
SDRAM_D31: R24.2 U1.F3 | length 24.9
  Top Layer w0.169: U1.F3@40.869,35.139 40.876,35.139 41.262,35.525 v1(41.269,35.525)
  Bottom Layer w0.169: R24.2@35.687,48.501 35.511,48.325 35.511,47.752 35.511,46.985 35.405,46.879 35.299,46.773 35.299,46.562 35.405,46.456 36.209,46.456 36.315,46.35 36.315,46.138 36.209,46.032 35.071,46.032 34.966,45.927 34.966,45.715 35.071,45.609 36.278,45.609 36.384,45.503 36.384,45.292 36.278,45.186 35.276,45.186 35.17,45.08 35.17,44.868 35.276,44.762 36.294,44.762 36.4,44.657 36.4,44.572 36.4,42.515 37.294,41.62 37.294,40.392 38.613,39.074 41.06,39.074 41.462,39.475 42.057,39.475 42.469,39.063 42.469,36.726 v1(41.269,35.525)
SDRAM_NBL0: R71.1 U1.C4 | length 14.2
  Top Layer w0.169: v1(41.269,37.139) U1.C4@41.669,37.539
  Bottom Layer w0.169: R71.1@32.898,45.712 33.674,44.936 33.674,44.338 34.814,43.198 34.814,40.828 38.503,37.139 v1(41.269,37.139)
SDRAM_NBL1: R69.1 U1.B4 | length 15.3
  Top Layer w0.169: v1(41.269,37.946) 41.273,37.946 41.666,38.339 U1.B4@41.669,38.339
  Bottom Layer w0.169: R69.1@32.906,47.117 32.906,46.998 34.137,45.767 34.137,44.602 35.225,43.514 35.225,41.12 38.462,37.883 39.493,37.883 39.978,38.369 40.846,38.369 v1(41.269,37.946)
SDRAM_NBL2: R67.1 U1.A4 | length 3.6
  Top Layer w0.169: U1.A4@41.669,39.139 41.672,39.142 41.672,40.103 v1(41.675,40.106)
  Bottom Layer w0.169: R67.1@41.021,42.405 41.021,42.213 41.021,41.429 41.702,40.749 41.702,40.133 v1(41.675,40.106)
SDRAM_NBL3: R65.1 U1.A3 | length 3.8
  Top Layer w0.169: v1(40.841,40.175) 40.855,40.161 40.855,39.153 U1.A3@40.869,39.139
  Bottom Layer w0.169: R65.1@39.624,42.405 39.624,41.821 39.624,41.393 v1(40.841,40.175)
SDRAM_R_A0: R45.2 U2.G8 | length 52.5
  Top Layer w0.169: v1(44.38,62.821) 44.38,62.8 44.757,62.423 U2.G8@44.757,62.401
  L4_SIG w0.169: v1(25.489,45.053) 25.501,45.065 25.501,45.747 25.501,45.831 25.396,45.937 25.226,45.937 25.12,46.043 25.12,46.254 25.226,46.36 25.402,46.36 25.508,46.466 25.508,46.677 25.402,46.783 25.226,46.783 25.12,46.889 25.12,47.1 25.226,47.206 25.402,47.206 25.508,47.312 25.508,47.523 25.402,47.629 25.226,47.629 25.12,47.735 25.12,47.946 25.226,48.052 25.402,48.052 25.508,48.158 25.508,48.369 25.402,48.475 25.39,48.475 25.285,48.581 25.285,48.792 25.39,48.898 25.396,48.898 25.501,49.004 25.501,49.675 25.555,49.729 38.448,62.622 38.628,62.802 38.956,62.802 39.062,62.696 39.062,61.626 39.167,61.52 39.379,61.52 39.485,61.626 39.485,62.831 39.59,62.937 39.802,62.937 39.908,62.831 39.908,61.626 40.013,61.52 40.225,61.52 40.331,61.626 40.331,62.831 40.436,62.937 40.648,62.937 40.754,62.831 40.754,61.626 40.859,61.52 41.071,61.52 41.177,61.626 41.177,62.831 41.282,62.937 41.494,62.937 41.6,62.831 41.6,61.626 41.705,61.52 41.917,61.52 42.023,61.626 42.023,62.831 42.128,62.937 42.34,62.937 42.446,62.831 42.446,61.626 42.551,61.52 42.763,61.52 42.869,61.626 42.869,62.831 42.974,62.937 43.186,62.937 43.292,62.831 43.292,61.717 43.397,61.611 43.609,61.611 43.714,61.717 43.714,62.696 43.82,62.802 44.111,62.802 44.361,62.802 v1(44.38,62.821)
  Bottom Layer w0.169: v1(25.489,45.053) 25.534,45.053 26.257,44.329 31.35,44.329 R45.2@31.356,44.323
SDRAM_R_A1: R43.2 U2.G9 | length 54.2
  Top Layer w0.169: U2.G9@44.757,63.201 v1(44.757,64.074)
  L4_SIG w0.169: v1(23.975,45.295) 23.99,45.31 23.99,45.573 23.99,45.658 23.884,45.764 23.863,45.764 23.757,45.869 23.757,46.081 23.863,46.187 24.118,46.187 24.223,46.292 24.223,46.504 24.118,46.61 23.863,46.61 23.757,46.715 23.757,46.927 23.863,47.033 24.118,47.033 24.223,47.138 24.223,47.35 24.118,47.456 23.863,47.456 23.757,47.561 23.757,47.773 23.863,47.879 24.118,47.879 24.223,47.984 24.223,48.196 24.118,48.302 23.863,48.302 23.757,48.407 23.757,48.619 23.863,48.725 24.118,48.725 24.223,48.83 24.223,49.042 24.118,49.148 23.863,49.148 23.757,49.253 23.757,49.465 23.863,49.571 24.118,49.571 24.223,49.676 24.223,49.888 24.118,49.994 24.096,49.994 23.99,50.099 23.99,50.211 23.99,50.322 26.194,52.525 26.553,52.884 26.702,52.884 26.935,52.652 27.084,52.652 27.234,52.801 27.234,52.951 26.878,53.307 26.878,53.457 27.027,53.606 27.177,53.606 27.533,53.25 27.683,53.25 27.832,53.399 27.832,53.549 27.476,53.905 27.476,54.055 27.625,54.204 27.775,54.204 28.131,53.848 28.281,53.848 28.43,53.998 28.43,54.147 28.074,54.504 28.074,54.653 28.224,54.803 28.373,54.803 28.73,54.446 28.879,54.446 29.029,54.596 29.029,54.745 28.672,55.102 28.672,55.251 28.822,55.401 28.971,55.401 29.328,55.044 29.477,55.044 29.627,55.194 29.627,55.344 29.271,55.7 29.271,55.849 29.42,55.999 29.57,55.999 29.926,55.643 30.076,55.643 30.225,55.792 30.225,55.942 29.869,56.298 29.869,56.448 30.018,56.597 30.168,56.597 30.524,56.241 30.674,56.241 30.823,56.39 30.823,56.54 30.467,56.896 30.467,57.046 30.616,57.195 30.766,57.195 31.122,56.839 31.272,56.839 31.422,56.989 31.422,57.138 31.11,57.45 31.11,57.6 31.259,57.749 31.409,57.749 31.488,57.67 31.637,57.67 31.787,57.82 31.787,57.969 31.787,58.119 35.06,61.392 35.536,61.392 35.941,61.797 35.941,62.282 36.475,62.816 38.175,64.516 44.315,64.516 v1(44.757,64.074)
  Bottom Layer w0.169: v1(23.975,45.295) 26.304,42.965 31.317,42.965 R43.2@31.356,42.926
SDRAM_R_A2: R41.2 U2.F7 | length 56.2
  Top Layer w0.169: v1(43.546,61.225) 43.563,61.225 43.94,61.601 U2.F7@43.957,61.601
  L4_SIG w0.169: v1(26.035,41.529) 26.005,41.559 26.005,42.316 26.005,42.401 25.899,42.507 25.226,42.507 25.12,42.612 25.12,42.824 25.226,42.93 26.133,42.93 26.238,43.035 26.238,43.247 26.133,43.353 25.226,43.353 25.12,43.458 25.12,43.67 25.226,43.776 26.133,43.776 26.238,43.881 26.238,44.093 26.133,44.199 25.981,44.199 25.875,44.304 25.875,44.516 25.981,44.622 26.133,44.622 26.238,44.727 26.238,44.939 26.133,45.045 25.981,45.045 25.875,45.15 25.875,45.362 25.981,45.468 26.133,45.468 26.238,45.573 26.238,45.785 26.133,45.891 25.871,45.891 25.765,45.996 25.765,46.208 25.871,46.314 26.133,46.314 26.238,46.419 26.238,46.631 26.133,46.737 25.878,46.737 25.772,46.842 25.772,47.054 25.878,47.16 26.133,47.16 26.238,47.265 26.238,47.477 26.133,47.583 25.878,47.583 25.772,47.688 25.772,47.9 25.878,48.006 26.133,48.006 26.238,48.111 26.238,48.323 26.133,48.429 25.878,48.429 25.772,48.534 25.772,48.746 25.878,48.852 25.899,48.852 26.005,48.957 26.005,49.158 26.005,49.319 27.059,50.372 27.118,50.432 27.118,50.582 27.029,50.671 27.029,50.82 27.179,50.97 27.328,50.97 27.602,50.697 27.751,50.697 27.901,50.846 27.901,50.996 27.627,51.269 27.627,51.419 27.777,51.568 27.927,51.568 28.2,51.295 28.349,51.295 28.499,51.444 28.499,51.594 28.226,51.867 28.226,52.017 28.375,52.166 28.525,52.166 28.798,51.893 28.948,51.893 29.097,52.043 29.097,52.192 28.824,52.465 28.824,52.615 28.973,52.765 29.123,52.765 29.396,52.491 29.546,52.491 29.695,52.641 29.695,52.79 29.422,53.064 29.422,53.213 29.572,53.363 29.721,53.363 29.994,53.09 30.144,53.09 30.294,53.239 30.294,53.389 30.02,53.662 30.02,53.811 30.17,53.961 30.319,53.961 30.593,53.688 30.742,53.688 30.892,53.837 30.892,53.987 30.619,54.26 30.619,54.41 30.768,54.559 30.918,54.559 31.191,54.286 31.34,54.286 31.49,54.436 31.49,54.585 31.217,54.858 31.217,55.008 31.366,55.157 31.516,55.157 31.789,54.884 31.939,54.884 32.088,55.034 32.088,55.183 31.815,55.456 31.815,55.606 31.965,55.756 32.114,55.756 32.387,55.482 32.537,55.482 32.686,55.632 32.686,55.781 32.413,56.055 32.413,56.204 32.563,56.354 32.712,56.354 32.985,56.081 33.135,56.081 33.285,56.23 33.285,56.38 33.011,56.653 33.011,56.802 33.161,56.952 33.31,56.952 33.584,56.679 33.733,56.679 33.883,56.828 33.883,56.978 33.61,57.251 33.61,57.401 33.759,57.55 33.909,57.55 34.182,57.277 34.331,57.277 34.481,57.427 34.481,57.576 34.208,57.849 34.208,57.999 34.357,58.148 34.507,58.148 34.78,57.875 34.93,57.875 35.079,58.025 35.079,58.174 34.806,58.448 34.806,58.597 34.956,58.747 35.105,58.747 35.194,58.657 35.344,58.657 35.959,59.273 37.936,61.25 43.521,61.25 v1(43.546,61.225)
  Bottom Layer w0.169: v1(26.035,41.529) R41.2@31.356,41.529
SDRAM_R_A3: R39.2 U2.F3 | length 54.9
  Top Layer w0.169: v1(43.59,58.843) 43.59,58.806 43.957,58.439 U2.F3@43.957,58.401
  L4_SIG w0.169: v1(28.02,40.132) 28.02,40.609 28.02,40.694 27.914,40.799 27.838,40.799 27.732,40.905 27.732,41.117 27.838,41.222 28.082,41.222 28.187,41.328 28.187,41.54 28.082,41.645 27.838,41.645 27.732,41.751 27.732,41.963 27.838,42.068 28.082,42.068 28.187,42.174 28.187,42.386 28.082,42.491 27.838,42.491 27.732,42.597 27.732,42.809 27.838,42.914 28.082,42.914 28.187,43.02 28.187,43.232 28.082,43.337 27.838,43.337 27.732,43.443 27.732,43.655 27.838,43.76 28.082,43.76 28.187,43.866 28.187,44.078 28.082,44.183 27.838,44.183 27.732,44.289 27.732,44.501 27.838,44.606 28.082,44.606 28.187,44.712 28.187,44.924 28.082,45.029 27.838,45.029 27.732,45.135 27.732,45.347 27.838,45.452 28.082,45.452 28.187,45.558 28.187,45.77 28.082,45.875 27.838,45.875 27.732,45.981 27.732,46.193 27.838,46.298 28.082,46.298 28.187,46.404 28.187,46.616 28.082,46.721 27.88,46.721 27.774,46.827 27.774,47.039 27.88,47.144 27.914,47.144 28.02,47.25 28.02,48.25 28.223,48.453 28.372,48.601 28.431,48.661 28.431,48.81 28.383,48.859 28.383,49.008 28.533,49.158 28.682,49.158 28.945,48.895 29.095,48.895 29.244,49.044 29.244,49.194 28.981,49.457 28.981,49.606 29.131,49.756 29.281,49.756 29.543,49.493 29.693,49.493 29.842,49.643 29.842,49.792 29.58,50.055 29.58,50.205 29.729,50.354 29.879,50.354 30.142,50.091 30.291,50.091 30.441,50.241 30.441,50.39 30.178,50.653 30.178,50.803 30.327,50.952 30.477,50.952 30.74,50.689 30.889,50.689 31.039,50.839 31.039,50.989 30.776,51.251 30.776,51.401 30.926,51.55 31.075,51.55 31.338,51.288 31.488,51.288 31.637,51.437 31.637,51.587 31.374,51.85 31.374,51.999 31.524,52.149 31.673,52.149 31.936,51.886 32.086,51.886 32.235,52.035 32.235,52.185 31.973,52.448 31.973,52.597 32.122,52.747 32.272,52.747 32.534,52.484 32.684,52.484 32.834,52.634 32.834,52.783 32.571,53.046 32.571,53.196 32.72,53.345 32.87,53.345 33.133,53.082 33.282,53.082 33.432,53.232 33.432,53.381 33.169,53.644 33.169,53.794 33.318,53.943 33.468,53.943 33.731,53.681 33.88,53.681 34.03,53.83 34.03,53.98 33.767,54.242 33.767,54.392 33.917,54.542 34.066,54.542 34.329,54.279 34.479,54.279 34.628,54.428 34.628,54.578 34.365,54.841 34.365,54.99 34.515,55.14 34.664,55.14 34.927,54.877 35.077,54.877 35.226,55.026 35.226,55.176 34.964,55.439 34.964,55.588 35.113,55.738 35.263,55.738 35.526,55.475 35.675,55.475 35.825,55.625 35.825,55.774 35.562,56.037 35.562,56.187 35.711,56.336 35.861,56.336 36.124,56.073 36.273,56.073 36.423,56.223 36.423,56.372 36.16,56.635 36.16,56.785 36.31,56.934 36.459,56.934 36.722,56.672 36.871,56.672 37.021,56.821 37.021,56.971 36.758,57.233 36.758,57.383 36.908,57.533 37.057,57.533 37.32,57.27 37.47,57.27 37.619,57.419 37.619,57.569 37.356,57.832 37.356,57.981 37.506,58.131 37.656,58.131 37.918,57.868 38.068,57.868 38.217,58.018 38.217,58.167 38.152,58.232 38.152,58.382 38.433,58.662 38.612,58.842 38.994,58.842 39.078,58.842 39.184,58.947 39.184,58.974 39.29,59.08 39.501,59.08 39.607,58.974 39.607,58.662 39.713,58.557 39.924,58.557 40.03,58.662 40.03,58.974 40.136,59.08 40.347,59.08 40.453,58.974 40.453,58.662 40.559,58.557 40.77,58.557 40.876,58.662 40.876,58.974 40.982,59.08 41.193,59.08 41.299,58.974 41.299,58.662 41.405,58.557 41.616,58.557 41.722,58.662 41.722,58.974 41.828,59.08 42.039,59.08 42.145,58.974 42.145,58.662 42.251,58.557 42.462,58.557 42.568,58.662 42.568,58.974 42.674,59.08 42.885,59.08 42.991,58.974 42.991,58.947 43.097,58.842 43.275,58.842 43.588,58.842 v1(43.59,58.843)
  Bottom Layer w0.169: v1(28.02,40.132) R39.2@31.356,40.132
SDRAM_R_A4: R37.2 U2.G1 | length 53.8
  Top Layer w0.169: v1(44.356,56.402) U2.G1@44.756,56.801
  L4_SIG w0.169: v1(29.531,38.787) 29.531,39.141 29.531,39.226 29.426,39.331 29.391,39.331 29.285,39.437 29.285,39.649 29.391,39.754 30.513,39.754 30.619,39.86 30.619,40.072 30.513,40.177 29.391,40.177 29.285,40.283 29.285,40.495 29.391,40.6 30.513,40.6 30.619,40.706 30.619,40.918 30.513,41.023 29.391,41.023 29.285,41.129 29.285,41.341 29.391,41.446 30.513,41.446 30.619,41.552 30.619,41.764 30.513,41.869 29.391,41.869 29.285,41.975 29.285,42.187 29.391,42.292 30.513,42.292 30.619,42.398 30.619,42.61 30.513,42.715 29.756,42.715 29.65,42.821 29.65,43.033 29.756,43.138 30.513,43.138 30.619,43.244 30.619,43.456 30.513,43.561 30.244,43.561 30.139,43.667 30.139,43.879 30.244,43.984 30.513,43.984 30.619,44.09 30.619,44.302 30.513,44.407 30.247,44.407 30.142,44.513 30.142,45.263 30.142,45.926 29.531,46.536 29.531,47.401 29.835,47.704 30.193,48.063 30.343,48.061 30.464,47.938 30.613,47.937 30.764,48.085 30.766,48.234 30.641,48.361 30.643,48.511 30.794,48.659 30.943,48.658 31.062,48.536 31.212,48.535 31.363,48.683 31.364,48.833 31.202,48.998 31.204,49.147 31.355,49.295 31.504,49.294 31.66,49.135 31.81,49.133 31.961,49.281 31.962,49.431 31.8,49.596 31.802,49.746 31.953,49.894 32.102,49.892 32.259,49.733 32.408,49.731 32.559,49.88 32.561,50.029 32.399,50.194 32.4,50.344 32.551,50.492 32.701,50.49 32.857,50.331 33.006,50.33 33.157,50.478 33.159,50.627 32.997,50.793 32.998,50.942 33.149,51.09 33.299,51.089 33.455,50.929 33.605,50.928 33.756,51.076 33.757,51.226 33.595,51.391 33.597,51.54 33.748,51.688 33.897,51.687 34.01,51.571 34.16,51.57 34.311,51.718 34.313,51.867 34.193,51.989 34.195,52.139 34.346,52.287 34.495,52.285 34.526,52.254 34.676,52.252 34.827,52.4 34.828,52.55 34.83,52.699 36.651,54.52 37.651,55.52 37.911,55.52 38.207,55.52 40.956,55.52 41.062,55.626 41.062,55.837 40.956,55.943 38.421,55.943 38.316,56.049 38.316,56.26 38.421,56.366 39.264,56.366 39.37,56.472 39.37,57.106 39.476,57.212 39.687,57.212 39.793,57.106 39.793,56.472 39.899,56.366 41.379,56.366 41.485,56.26 41.485,55.626 41.591,55.52 43.474,55.52 v1(44.356,56.402)
  Bottom Layer w0.169: v1(29.531,38.787) 31.304,38.787 R37.2@31.356,38.735